# Altium PCB H0DR9.PcbDoc (part 2 of 2)
Units mil, origin at the board's own origin, x right, y up, seen from the top; angles counter-clockwise.
Board outline 1363.78 x 1181.1 mil, 2 copper layers (Top Layer, Bottom Layer); 49 components, 29 nets, 131 pads, 43 vias.
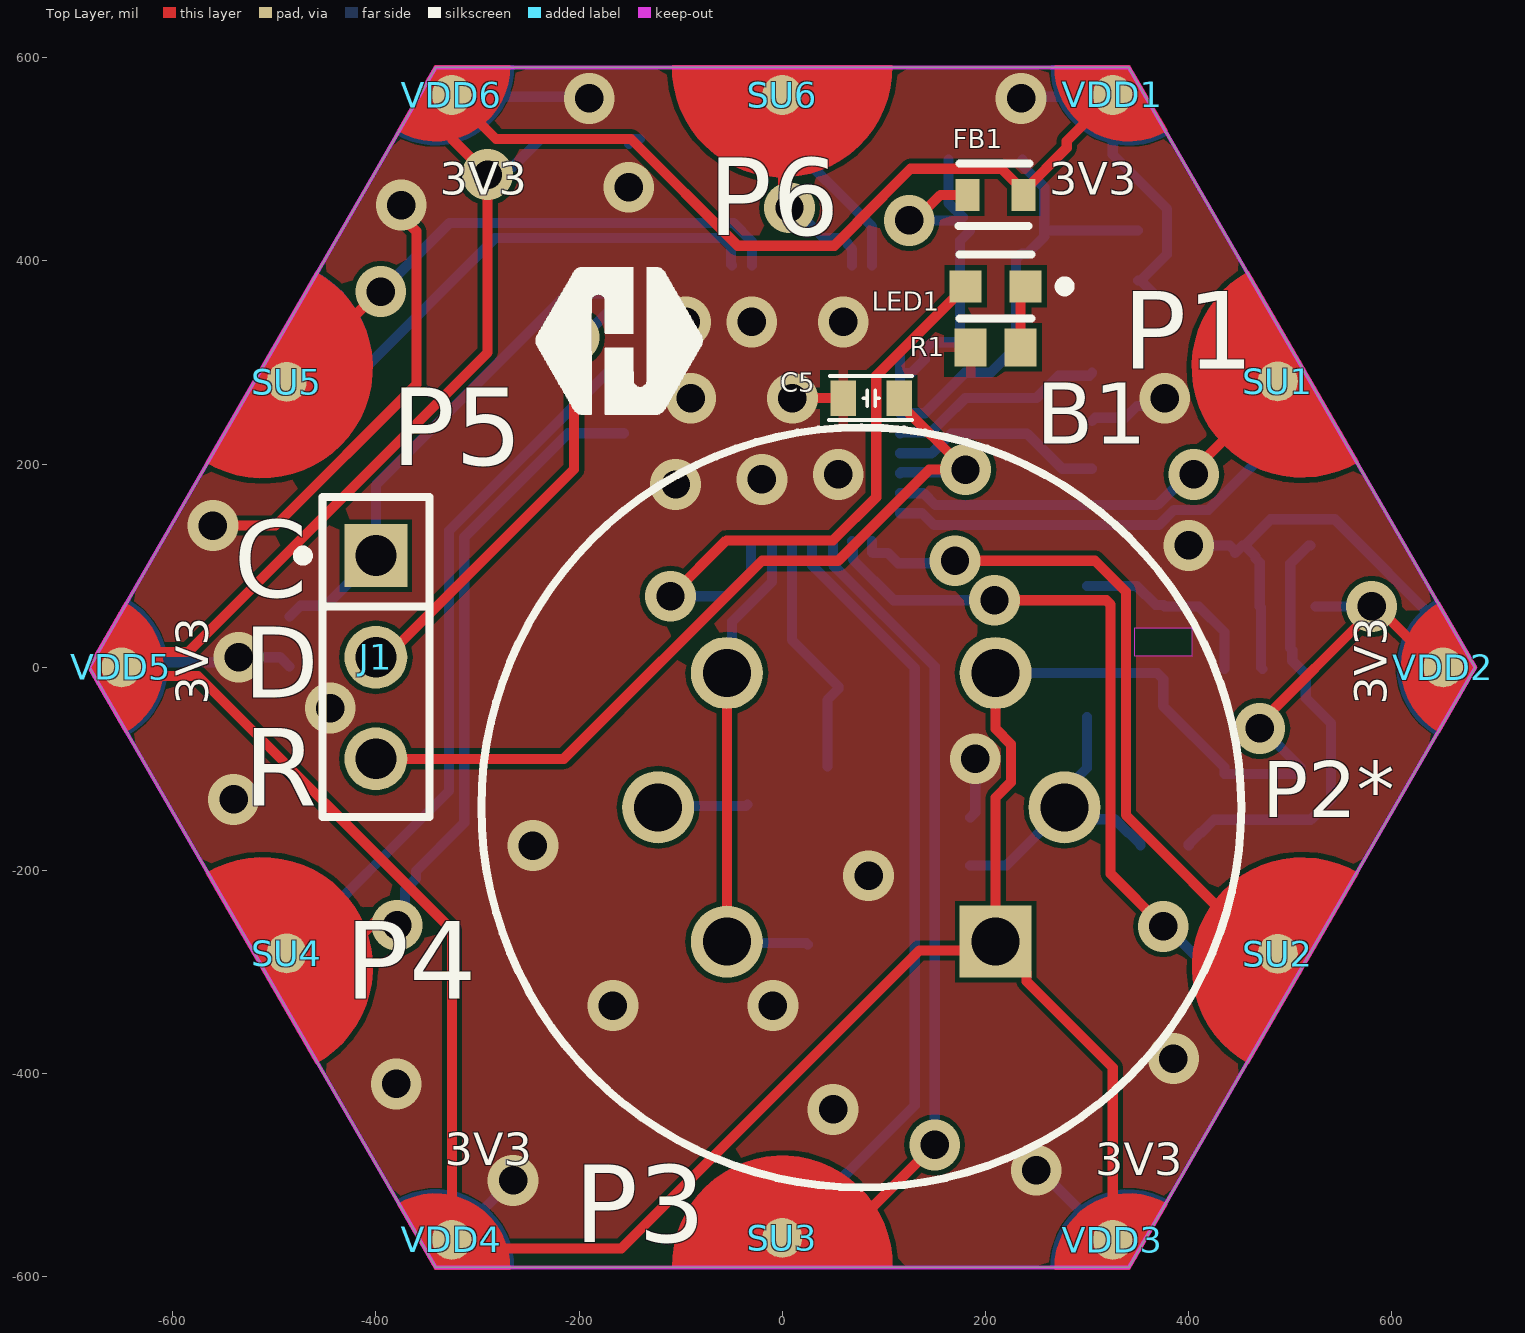
[diagram p0: Top Layer view]

## Part data (continued)
R2: library part "generic Resistor", "100mW Thick Film Resistors ±100ppm/℃ ±1% 10kΩ 0603 Chip Resistor - Surface Mount ROHS", Case Code (Imperial)=0603, Manufacturer="Yageo Group", Manufacturer Part Number=RC0603FR-0710KL, Max Operating Temperature=155°C, Min Operating Temperature=-55°C, Power Dissipation=100mW, Supplier Part Number=4023214, Temperature Coefficient=100ppm/°C, Tolerance=1%, Voltage Rating=75V, Voltage Rating (DC)=50V, Case Code (Metric)=0603, Case/Package=0603, Category="Chip SMD Resistors", China RoHS=Non-Compliant, ComponentLink1Description=https://datasheet.octopart.com:443/RC0603FR-0710KL-Yageo-datasheet-175887523.pdf?src-supplier=IHS, ComponentLink1URL=https://datasheet.octopart.com:443/RC0603FR-0710KL-Yageo-datasheet-175887523.pdf?src-supplier=IHS, ComponentLink2Description=https://datasheet.octopart.com:443/RC0603FR-0710KL-Yageo-datasheet-103092701.pdf?src-supplier=Upverter, ComponentLink2URL=https://datasheet.octopart.com:443/RC0603FR-0710KL-Yageo-datasheet-103092701.pdf?src-supplier=Upverter, ComponentLink3Description=https://datasheet.octopart.com:443/RC0603FR-0710KL-Yageo-datasheet-98239111.pdf?src-supplier=Upverter, ComponentLink3URL=https://datasheet.octopart.com:443/RC0603FR-0710KL-Yageo-datasheet-98239111.pdf?src-supplier=Upverter, ComponentLink4Description=https://datasheet.octopart.com:443/RC0603FR-0710KL-Yageo-datasheet-141265859.pdf?src-supplier=Upverter, ComponentLink4URL=https://datasheet.octopart.com:443/RC0603FR-0710KL-Yageo-datasheet-141265859.pdf?src-supplier=Upverter, ComponentLink5Description=https://sigma.octopart.com:443/138820526/technical_drawing/Yageo-RC0603FR-0710KL.pdf?src-supplier=Upverter, ComponentLink5URL=https://sigma.octopart.com:443/138820526/technical_drawing/Yageo-RC0603FR-0710KL.pdf?src-supplier=Upverter, ComponentLink6Description=https://datasheet.octopart.com:443/RC0603FR-0710KL-Yageo-datasheet-8328172.pdf?src-supplier=Farnell, ComponentLink6URL=https://datasheet.octopart.com:443/RC0603FR-0710KL-Yageo-datasheet-8328172.pdf?src-supplier=Farnell, ComponentLink7Description=https://datasheet.octopart.com:443/RC0603FR-0710KL-Yageo-datasheet-13691069.pdf?src-supplier=Farnell, ComponentLink7URL=https://datasheet.octopart.com:443/RC0603FR-0710KL-Yageo-datasheet-13691069.pdf?src-supplier=Farnell, ComponentLink8Description=https://datasheet.octopart.com:443/RC0603FR-0710KL-Yageo-datasheet-62067350.pdf?src-supplier=element14+APAC, ComponentLink8URL=https://datasheet.octopart.com:443/RC0603FR-0710KL-Yageo-datasheet-62067350.pdf?src-supplier=element14+APAC, ComponentLink9Description=https://datasheet.octopart.com:443/RC0603FR-0710KL-Yageo-datasheet-17842380.pdf?src-supplier=element14+APAC, ComponentLink9URL=https://datasheet.octopart.com:443/RC0603FR-0710KL-Yageo-datasheet-17842380.pdf?src-supplier=element14+APAC, ComponentLink10Description=https://datasheet.octopart.com:443/RC0603FR-0710KL-Yageo-datasheet-15599030.pdf?src-supplier=Future+Electronics, ComponentLink10URL=https://datasheet.octopart.com:443/RC0603FR-0710KL-Yageo-datasheet-15599030.pdf?src-supplier=Future+Electronics, ComponentLink11Description=https://datasheet.octopart.com:443/RC0603FR-0710KL-Yageo-datasheet-164759695.pdf?src-supplier=Future+Electronics, ComponentLink11URL=https://datasheet.octopart.com:443/RC0603FR-0710KL-Yageo-datasheet-164759695.pdf?src-supplier=Future+Electronics, ComponentLink12Description=https://datasheet.octopart.com:443/RC0603FR-0710KL-Yageo-datasheet-127823281.pdf?src-supplier=Future+Electronics, ComponentLink12URL=https://datasheet.octopart.com:443/RC0603FR-0710KL-Yageo-datasheet-127823281.pdf?src-supplier=Future+Electronics, ComponentLink13Description=https://datasheet.octopart.com:443/RC0603FR-0710KL-Yageo-datasheet-137700087.pdf?src-supplier=Future+Electronics, ComponentLink13URL=https://datasheet.octopart.com:443/RC0603FR-0710KL-Yageo-datasheet-137700087.pdf?src-supplier=Future+Electronics, ComponentLink14Description=https://datasheet.octopart.com:443/RC0603FR-0710KL-Yageo-datasheet-27584510.pdf?src-supplier=Future+Electronics, ComponentLink14URL=https://datasheet.octopart.com:443/RC0603FR-0710KL-Yageo-datasheet-27584510.pdf?src-supplier=Future+Electronics, ComponentLink15Description=https://datasheet.octopart.com:443/RC0603FR-0710KL-Yageo-datasheet-8324193.pdf?src-supplier=Future+Electronics, ComponentLink15URL=https://datasheet.octopart.com:443/RC0603FR-0710KL-Yageo-datasheet-8324193.pdf?src-supplier=Future+Electronics, ComponentLink16Description=https://datasheet.octopart.com:443/RC0603FR-0710KL-Yageo-datasheet-12596169.pdf?src-supplier=Newark, ComponentLink16URL=https://datasheet.octopart.com:443/RC0603FR-0710KL-Yageo-datasheet-12596169.pdf?src-supplier=Newark, ComponentLink17Description=https://datasheet.octopart.com:443/RC0603FR-0710KL-Yageo-datasheet-503470.pdf?src-supplier=Newark, ComponentLink17URL=https://datasheet.octopart.com:443/RC0603FR-0710KL-Yageo-datasheet-503470.pdf?src-supplier=Newark, ComponentLink18Description=https://datasheet.octopart.com:443/RC0603FR-0710KL-Yageo-datasheet-34211833.pdf?src-supplier=Newark, ComponentLink18URL=https://datasheet.octopart.com:443/RC0603FR-0710KL-Yageo-datasheet-34211833.pdf?src-supplier=Newark, ComponentLink19Description=https://datasheet.octopart.com:443/RC0603FR-0710KL-Yageo-datasheet-79472498.pdf?src-supplier=Megastar, ComponentLink19URL=https://datasheet.octopart.com:443/RC0603FR-0710KL-Yageo-datasheet-79472498.pdf?src-supplier=Megastar, ComponentLink20Description=https://datasheet.octopart.com/RC0603FR-0710KL-Yageo-datasheet-73766026.pdf, ComponentLink20URL=https://datasheet.octopart.com/RC0603FR-0710KL-Yageo-datasheet-73766026.pdf, ComponentLink21Description=https://datasheet.octopart.com:443/RC0603FR-0710KL-Yageo-datasheet-118562.pdf?src-supplier=DigiKey, ComponentLink21URL=https://datasheet.octopart.com:443/RC0603FR-0710KL-Yageo-datasheet-118562.pdf?src-supplier=DigiKey, ComponentLink22Description=http://sigma.octopart.com:80/rohs_statement/Yageo-company-2.pdf?src-supplier=Compliance+Statements, ComponentLink22URL=http://sigma.octopart.com:80/rohs_statement/Yageo-company-2.pdf?src-supplier=Compliance+Statements, ComponentLink23Description=http://sigma.octopart.com:80/conflict_mineral_statement/Yageo-company-3.pdf?src-supplier=Compliance+Statements, ComponentLink23URL=http://sigma.octopart.com:80/conflict_mineral_statement/Yageo-company-3.pdf?src-supplier=Compliance+Statements, Composition="Thick Film", Depth=800µm, Height=450µm, Lead Free="Lead Free", Lead Pitch=300µm, Length=1.6mm, Library=Hexabitz, Lifecycle Status=Production, Military Standard=Not, Mounting Technology="Surface Mount", Number of Terminals=2, Packaging="Tape & Reel", Pins=2, Power Rating=100mW, Pricing="5000=0.001, 25000=0.001, 150000=0.001, 500000=0.0009, 1500000=0.0009 (USD)", REACH SVHC=Yes, RoHS=Compliant, Schedule B="8533210045, 8533210045|8533210045|8533210045|8533210045|8533210045|8533210045|8533210045|8533210045|8533210045|8533210045|8533210045|8533210045|8533210045|8533210045|8533210045|8533210045|8533210045|8533210045|8533210045|8533210045|8533210045|8533210045|8533210045|85", Stock=22990000, Supplier="Future Electronics", Termination=SMD/SMT, Weight=2.012816mg, Width=800µm, Working Voltage=75V
R3: library part "generic Resistor", Library=Hexabitz
R4: library part CMP-26527-005608-1, "5.6kΩ ±5% 0.1W 0603 Thick Film Chip Resistor AEC-Q200 compliant", Case/Package=0603, Max Operating Temperature=155°C, Max Power Dissipation=100mW, Min Operating Temperature=-55°C, Package Quantity=10000, Resistance=5.6kR, Resistor Type="Thick Film", Temperature Coefficient=200ppm/°C, Tolerance=5%, Contact Plating=Tin, Features="Automotive AEC-Q200", Height=0.022inch, Length=0.061inch, Mount="Surface Mount", Number of Terminations=2, Packaging="Tape and Reel", Radiation Hardening=No, RoHS Compliant=Yes, Series=RMCF, Width=0.031inch
R5: library part CMP-009-00153-3, "Chip Resistor, 4,02 kOhms, +/-1 %, 63 mW, -55 to 155 degC, 0402", Case/Package=0402, Max Operating Temperature=155°C, Min Operating Temperature=-55°C, Power=63mW, Tolerance=1%, Pins=2
R6: library part CMP-2000-04394-2, "RES SMD 1.82K OHM 0.1% 1/10W", Manufacturer=Yageo, Manufacturer Part Number=RT0603BRD071K82L, Package=RT0603, Power Rating=0.1W, Resistance=1.82KΩ, Temperature="-55°C to +155°C", Temperature Coefficient="25 ppm/°C", Temperature Range High=+155°C, Temperature Range Low=-55°C, Tolerance=0.001, Voltage Rating=75V, Automotive=No, Category=Res, ComponentLink2Description=Datasheet, ComponentLink2URL=http://www.yageo.com/documents/recent/PYu-RT_1-to-0.01_RoHS_L_9.pdf, Composition="Thin Film", Device Class L1="Passive Components", Device Class L2=Resistors, Device Class L3="Chip SMD Resistors", Digikey Description="RES SMD 1.82K OHM 0.1% 1/10W", Footprint Url=http://www.yageo.com/exep/pages/download/literatures/PYu-R_Mount_10.pdf, Height=0.55mm, Ipc Land Pattern Name=RESC16080X45, Lead Free=Yes, Mouser Description="Thin Film Resistors - SMD 1/10W 1.82K ohm .1% 25ppm", Octopart=https://octopart.com/rt0603brd071k82l-yageo-1442926, RoHS=TRUE, Series=RT
R7: library part CMP-03211-009884-1, "CRGCQ 0603 10K 5%", Ambient Temperature Range High=+70°C, Manufacturer="TE Connectivity", Manufacturer Part Number=CRGCQ0603J10K, Package=CRGCQ0603, Power Rating=0.1W, Resistance=10KΩ, Temperature="-55°C to +155°C", Temperature Coefficient=±100ppm/°C, Temperature Range High=+155°C, Temperature Range Low=-55°C, Tolerance=0.05, Voltage Rating=75V, Category=Res, ComponentLink2Description=Datasheet, ComponentLink2URL=https://www.te.com/commerce/DocumentDelivery/DDEController?Action=showdoc&DocId=Data+Sheet%7F1773204-3%7F1%7Fpdf%7FEnglish%7FENG_DS_1773204-3_1.pdf%7F4-2176339-923, Composition="Thick Film", Device Class L1="Passive Components", Device Class L2=Resistors, Device Class L3="Chip SMD Resistors", Digikey Description="CRGCQ 0603 10K 5%", Height=0.55mm, Ipc Land Pattern Name=RESC16080X45, Lead Free=Yes, Mouser Description="Res Thick Film 0603 10K Ohm 5% 0.1W(1/10W) ±100ppm/C Pad SMD Automotive T/R", Octopart=https://octopart.com/crgcq0603j10k-te+connectivity-91018097, RoHS=TRUE, Series=CRGCQ
SD1 SD2 SD3 SD4 SD5 SD6: library part HEXABIT_UART_PORT_D
SU1 SU2 SU3 SU4 SU5 SU6: library part HEXABIT_UART_PORT_U
U1: "MCU 32-bit ARM Cortex M0+ RISC 512KB Flash 1.8V/2.5V/3.3V 48-Pin UFQFPN EP Tray", Manufacturer=STMicroelectronics, Supplier Part Number=497-STM32G0B1CEU6-ND, Category=Microcontrollers, Library=Hexabitz, Manufacturer Part Number=STM32G0B1CEU6, Pricing="1=4.78, 10=3.635, 25=3.3488, 100=3.0347, 260=2.87923, 520=2.7899, 1040=2.71638, 2600=2.63877 (USD)", RoHS=Yes, Stock=4305, Supplier=Digikey, Supplier 1=Digikey, Supplier Part Number 1=497-STM32G0B1CEU6-ND
U2: library part CMP-06325-000011-1, "IC REG BOOST ADJ 1.2A TSOT23-5", Case/Package=TSOT, Max Input Voltage=10V, Max Operating Temperature=125°C, Max Output Current=1A, Max Output Voltage=34V, Min Input Voltage=2.5V, Min Operating Temperature=-40°C, Package Quantity=3000, Switching Frequency=1.2MHz, Height=0.87mm, Lead Free="Lead Free", Length=2.9mm, Min Output Voltage=2.5V, Min Supply Voltage=2.5V, Mount="Surface Mount", Number of Outputs=1, Number of Pins=5, Operating Supply Voltage=10V, Output Configuration=Positive, Output Current=1A, Output Type=Adjustable, Output Voltage=34V, Packaging="Tape and Reel", Radiation Hardening=No, REACH SVHC="No SVHC", Synchronous Rectifier=No, Topology=Boost, Width=1.6mm
VDD1 VDD2 VDD3 VDD4 VDD5 VDD6: library part HEXABIT_POWER_PORT_U
X1: "Ceramic Resonator 8MHz ±0.5% (Tol) ±0.2% (Stability) 10pF 40Ohm 3-Pin CSMD T/R", Case Code (Imperial)=1206, Case Code (Metric)=3216, Frequency=8MHz, Frequency Stability=0.2%, Frequency Tolerance=0.5%, Load Capacitance=10pF, Manufacturer=Murata, Max Operating Temperature=125°C, Min Operating Temperature=-40°C, Package Quantity=1, Case/Package=1206, Category=Capacitors, Contact Plating=Gold, Height=0.031inch, Impedance=40R, Length=3.2mm, Library=Hexabitz, Manufacturer Part Number=CSTCE8M00G52Z-R0, Mounting Technology="Surface Mount", Packaging="Tape and Reel", Pins=3, RoHS Compliant=Yes, Self Resonant Frequency=8MHz, Series=CERALOCK®, Termination=SMD/SMT, Tolerance=0.5%, Width=1.3mm

## Via types
v1: diameter 50, hole 28, Top Layer to Bottom Layer, 43 vias

## Nets (pads, with @x,y where several pads share a name; then routed paths per layer and width w, separated by ;. In a path a pad name is that pad's centre, name@x,y a point inside that pad or via, vN(x,y) a via of type N, cw(c..) or ccw(c..) an arc to the next point about the centre after c; other vN are vias at no path point)
5V: B1.2 C7.1 D2.2 R4.1 | length 305.4
  Bottom Layer w10: C7.1 220.51,-195 B1.2 ; D2.2 300,-99.04 277.76,-121.28 B1.2 ; R4.1 352.67,-173.97 341.8,-163.11 340.78,-163.11 327.07,-149.4 289.4,-149.4 B1.2
CLK_BOOT: J1.1 R2.1 U1.36 | length 501.7
  Bottom Layer w10: R2.1 -474.25,60.75 -449.25,60.75 J1.1 -400,179.5 -211.23,368.27 U1.36
DATA: J1.2 U1.35 | length 460.6
  Top Layer w10: J1.2 -390,10 -205,195 v1(-205,325)
  Bottom Layer w10: v1(-205,325) -196.5,325 -173.83,347.68 -156.73,347.68 U1.35
GND: C5.1 C6.2 C7.2 D1.1 GND1.Pwr_D GND2.Pwr_D GND3.Pwr_D GND4.Pwr_D GND5.Pwr_D GND6.Pwr_D Q1.2 R1.1 R2.2 R3.1 R5.2 R6.2 R7.2 U1.49 U2.2 X1.P$2 | length 1982.7
  Top Layer w10: v1(-560.43,139.6) -498.83,139.6 -360.15,278.28 -360.15,429.32 -375,444.18 v1(-375,455) ; v1(10,265) C5.1 ; v1(85,-205) v1@85,-200 ; R1.1@185.39,312.05 R1.1 ; v1@190,-95 v1(190,-90)
  Bottom Layer w10: GND5.Pwr_D -645.39,5 -540,5 v1(-535,10) -494.21,10 R2.2 ; v1(-445,-40) v1@-445,-36.26 ; GND4.Pwr_D -324.3,-563.39 -265.91,-505 v1(-265,-505) ; GND6.Pwr_D -323.51,561.69 -191.69,561.69 v1(-190,560) v1@-187.32,560 ; D1.1@-151.03,515.16 D1.1@-146.19,520 ; D1.1@-147.32,520 D1.1@-140.16,520 ; v1@78.94,-205 v1(85,-205) ; C7.2 190,-142.71 v1(190,-90) ; v1(235,560) 236.69,561.69 323.5,561.69 GND1.Pwr_D 325.2,504.8 378.7,451.3 378.7,406.53 R3.1@352.95,380.79 ; v1(250,-495) 253.4,-495 321.8,-563.39 GND3.Pwr_D ; X1.P$2 307.87,245.63 337.4,245.63 349.11,257.35 377.35,257.35 380.71,260.71 v1(376.43,265) ; R3.1 R3.1@352.95,380.79 ; R3.1@363.7,370.04 R3.1@352.95,380.79 ; v1(400,120) 440.35,120 445.57,114.78 445.57,112.5 R6.2 R6.2@455.04,120 ; U2.2 471.3,-0.16 471.3,58.7 C6.2 470,103.07 465.79,107.28 465.79,109.25 R6.2@455.04,120 ; GND2.Pwr_D 650.39,39.11 543.75,145.75 480.79,145.75 R6.2@455.04,120
  other v1: 50,-435 -380,-410 385,-385 -166.73,-332.84 -9.25,-332.84 -245.47,-175.36 -540,-130 -105,180 -20,185 55,190 -90,265 -95,340 -30,340 60,340 -151.03,472.56
Heater_Control: Q1.1 R7.1 U1.17 | length 245.3
  Bottom Layer w10: U1.17 9.53,26.85 55.32,-18.94 R7.1 55.32,-21.06 44.37,-32.01 Q1.1
MQSigA: B1.4 B1.6 R5.1 U1.18 | length 493.1
  Top Layer w10: B1.6 B1.4
  Bottom Layer w10: B1.6 -53.13,-271.36 23.64,-271.36 R5.1 ; B1.4 -49.55,-0.58 -49.55,44.92 -10.16,84.32 U1.18
NetB1_5: B1.5 Q1.3 | length 89
  Bottom Layer w10: B1.5 -120.87,-136.38 -35.75,-136.38 Q1.3
NetD2_1: D2.1 L1.1 U2.1 | length 190.2
  Bottom Layer w10: D2.1 349,80 367.5,61.5 L1.1 376.5,60 410,60 435.2,34.8 U2.1
NetLED1_1: LED1.1 R1.2 | length 62
  Top Layer w10: R1.2 234.61,370.08 LED1.1
NetLED1_2: LED1.2 U1.19 | length 606.4
  Top Layer w10: v1(-110,70) -55,125 50,125 92.52,167.52 92.52,287.05 LED1.2
  Bottom Layer w10: v1(-110,70) -55,70 -30.75,94.25 -30.75,123.27 U1.19
NetR4_2: R4.2 R6.1 U2.3 | length 435.2
  Bottom Layer w10: R4.2 400,-173.97 410.87,-163.11 411.89,-163.11 425,-150 520,-150 540,-130 540,-55 515.17,-30.17 515.17,-6.63 502.01,6.54 502.01,17.08 500,19.09 500,101.97 518.03,120 R6.1
NetU1_8: U1.8 X1.P$3 | length 213.8
  Bottom Layer w10: U1.8 116.73,231.38 146.34,231.38 159.64,244.69 ; 159.69,244.69 180,265 250,265 272.12,287.12 302.12,287.12 X1.P$3
NetU1_9: U1.9 X1.P$1 | length 211.4
  Bottom Layer w10: U1.9 146.96,210.79 165.86,229.69 ; 165.9,229.69 166.21,230 240.99,230 275.47,195.52 X1.P$1
NRST: C5.2 J1.3 U1.10 | length 861.6
  Top Layer w10: J1.3 -215,-90 -20,105 55,105 144.69,194.69 v1(180.36,194.69) 180.36,194.84 115.12,260.08 C5.2
  Bottom Layer w10: U1.10 116.73,192.01 177.68,192.01 v1(180.36,194.69)
UART1_RX: SD4.UART_D U1.32 | length 718.6
  Bottom Layer w10: SD4.UART_D -328,-121.7 -328,134.45 -173.83,288.62 -156.73,288.62 U1.32
UART1_TX: SU4.UART_U U1.29 | length 734.8
  Top Layer w10: SU4.UART_U -435.08,-281.5 -424.16,-270.58 -421.13,-270.58 -397.64,-247.08 -385.96,-247.08 v1(-379.16,-253.88)
  Bottom Layer w10: v1(-379.16,-253.88) -371.51,-246.23 -371.51,-218.58 -360.43,-207.5 -360.43,-200.43 -313,-153 -313,128.23 -210.76,230.47 U1.29
UART2_RX: SD2.UART_D U1.14 | length 752.7
  Top Layer w10: v1(208.89,66.11) 318.89,66.11 323.19,61.81 323.19,-203.19 v1(375,-255)
  Bottom Layer w10: U1.14 69.49,123.27 69.49,106.17 109.55,66.11 v1(208.89,66.11) ; v1(375,-255) 377.78,-255 404.67,-281.89 SD2.UART_D
UART2_TX: SU2.UART_U U1.13 | length 705.1
  Top Layer w10: v1(170,105) 307.84,105 338.19,74.65 338.19,-145.35 469.11,-276.28 482.18,-276.28 SU2.UART_U
  Bottom Layer w10: U1.13 88.27,113.35 89.17,112.44 104.17,112.44 114.17,102.44 167.44,102.44 v1(170,105)
UART3_RX: SD6.UART_D U1.48 | length 204.1
  Bottom Layer w10: SD6.UART_D 0,522.37 88.27,434.11 U1.48
UART3_TX: SU6.UART_U U1.47 | length 208.9
  Top Layer w10: SU6.UART_U 0.77,562.63 0.77,458.73 v1(7.09,452.4)
  Bottom Layer w10: v1(7.09,452.4) 11.05,452.4 40.89,422.56 58.95,422.56 64.8,416.7 64.8,415.73 68.58,411.95 68.58,395.94 U1.47
UART4_RX: SD1.UART_D U1.12 | length 469.5
  Bottom Layer w10: U1.12 137.56,151.73 149.29,140 370.5,140 385.5,155 419.5,155 487.8,223.3 SD1.UART_D
UART4_TX: SU1.UART_U U1.11 | length 432.4
  Top Layer w10: v1(405,190) 405,194.35 487.8,277.15 SU1.UART_U
  Bottom Layer w10: U1.11 139.09,171.42 150.82,159.69 368.98,159.69 399.29,190 v1(405,190)
UART5_RX: SD5.UART_D U1.41 | length 517.8
  Bottom Layer w10: SD5.UART_D -423.5,281.5 -282.44,422.56 -98.94,422.56 -59.17,422.56 -50.43,413.83 -50.43,396.73 U1.41
UART5_TX: SU5.UART_U U1.42 | length 553.7
  Top Layer w10: SU5.UART_U -485.85,281.11 -397.1,369.85 v1(-395.15,369.85)
  Bottom Layer w10: v1(-395.15,369.85) -327.44,437.56 -105.16,437.56 -48.31,437.56 -29.84,419.09 U1.42
UART6_RX: SD3.UART_D U1.16 | length 781.5
  Bottom Layer w10: SD3.UART_D 130.32,-431.18 130.32,-0.58 29.31,100.42 29.31,124.07 U1.16
UART6_TX: SU3.UART_U U1.15 | length 824
  Top Layer w10: SU3.UART_U 58.5,-561.5 v1(150,-470)
  Bottom Layer w10: U1.15 49.8,123.27 49.8,101.15 150,0.95 v1(150,-470)
VDD: B1.1 B1.3 C6.1 D1.2 FB1.2@237.56,465 L1.2 U2.4 U2.5 VDD1.Pwr_U VDD2.Pwr_U VDD3.Pwr_U VDD4.Pwr_U VDD5.Pwr_U VDD6.Pwr_U | length 4381.1
  Top Layer w10: VDD5.Pwr_U VDD5.Pwr_U@-642.44,0 ; B1.3 210,-60.5 225,-75.5 225,-113.04 210,-128.04 B1.1 ; FB1.2@237.56,465 FB1.2@237.56,468.94 ; VDD3.Pwr_U 325.2,-393.75 240.43,-308.98 240.43,-300.43 B1.1 ; VDD1.Pwr_U 279.99,518.18 279.99,511.37 FB1.2@237.56,468.94 ; v1(470,-60) 470,-55 580,55 v1(580,60) 585.19,60 645.19,0 VDD2.Pwr_U ; VDD5.Pwr_U@-642.44,0 -627.44,15 -585,15 -290,310 v1(-290,485) -325.2,520.2 VDD6.Pwr_U -281.81,520 -148.97,520 -43.97,415 51.21,415 73.73,437.52 73.73,438.23 126.25,490.75 215.75,490.75 FB1.2@237.56,468.94 ; VDD5.Pwr_U@-642.44,0 -633.9,-8.55 -575,-8.55 -325.2,-258.34 VDD4.Pwr_U -317.25,-563.39 -308.71,-571.94 -158.39,-571.94 135,-278.55 201.45,-278.55 B1.1
  Bottom Layer w10: v1(-290,485) -282.35,492.65 -265.22,492.65 -237.87,520 D1.2 ; B1.3 369.01,-5.51 L1.2 375,-38.11 435.2,-98.31 U2.5 U2.4 510,-98.31 471.69,-60 v1(470,-60) ; C6.1 v1(580,60)
VDDA: C1.2 C2.1 C3.2 C4.2 FB1.2@182.44,465 U1.4 U1.5 U1.6 | length 411.6
  Top Layer w10: v1(125,440) 130.63,440 155.63,465 FB1.2@182.44,465
  Bottom Layer w10: U1.6 U1.5 ; U1.4 U1.5 ; v1(125,440) C2.1@174.88,440 ; C4.2 163.5,457.38 C2.1@177.88,443 ; C2.1 174.88,420 C3.2 C1.2 147.28,320 140.21,312.93 140.21,303.09 126.65,289.53 U1.5
VSSA: C1.1 C2.2 C3.1 C4.1 R3.2 U1.7 | length 441.7
  Bottom Layer w10: U1.7 140.16,250.16 180,290 204.92,290 230,315.08 C1.1 C3.1 230,401.64 235.86,407.5 241.38,407.5 257.88,424 C2.2 ; C4.1 236.5,494 257.88,472.62 C2.2 ; R3.2 C2.2
pads on no net: U1.1 U1.2 U1.3 U1.20 U1.21 U1.22 U1.23 U1.24 U1.25 U1.26 U1.27 U1.28 U1.30 U1.31 U1.33 U1.34 U1.37 U1.38 U1.39 U1.40 U1.43 U1.44 U1.45 U1.46

## Polygon pours and split planes (outlines as drawn)
GND on Top Layer "GND_top" (solid, remove dead copper, pour order 0): -340.94,-590.55 340.94,-590.55 681.89,0 340.94,590.55 -340.94,590.55 -681.89,0
GND on Bottom Layer "GND_bottom" (solid, remove dead copper, pour order 1): -340.94,-590.55 340.94,-590.55 681.89,0 340.94,590.55 -340.94,590.55 -681.89,0

## Keep-outs
Keep-Out Layer:
  the board outline again, w3.94

## Silkscreen, mask and mechanical layers (free items; w line width, h text height)
Top Overlay:
  drawing of 1337 lines, arcs and shapes, not listed
  text "3V3" at -337,465.01 h32
  text "3V3" at 263,465.01 h32
  text "P6" at -73.11,425.36 h76
  text "P1" at 335,294.02 h76
  text "P5" at -385,199.02 h76
  text "C" at -540,69.02 h76
  text "D" at -530,-29.99 h70
  text "3V3" at -565.01,-37 h32 r90
  text "3V3" at 594.99,-37 h32 r90
  text "R" at -530,-135.98 h76
  text "P2*" at 472.5,-147.49 h55
  text "P4" at -430,-325.98 h76
  text "3V3" at -332,-489.99 h32
  text "3V3" at 308,-499.99 h32
  text "P3" at -205,-565.98 h76
Bottom Overlay:
  text "GND" at 257,545.01 h32
  text "P6" at 50,429.02 h76
  text "GND" at -308,425.01 h32
  text "P1" at 427.5,277.51 h60
  text "P5" at -315,214.02 h76
  text "H0DR9" at -245,125 h70 r90
  text "GND" at -565.01,57 h32 r90
  text "GND" at 584.99,32 h32 r90
  text "P4" at -275,-380.98 h76
  text "P2*" at 420,-400.98 h76
  text "P3" at -25,-480.98 h76
  text "GND" at 352,-484.99 h32
  text "GND" at -248,-494.99 h32
Top Solder:
  drawing of 20 lines, arcs and shapes, not listed
Dimensions:
  the board outline again, w3.94

## Text inside footprints (layer, text, board x,y; h text height)
C2: Mechanical 32 "2" at 247.88,430 h25 r180; Mechanical 32 "1" at 174.88,430 h25 r180; Mechanical 33 "C40" at 294.88,437.17 h25 r180
C4: Mechanical 32 "1" at 246.5,500 h25; Mechanical 32 "2" at 173.5,500 h25; Mechanical 33 "C40" at 126.5,492.83 h25